# Altium PCB PCB.PcbDoc
Units mm, origin at the board's own origin, x right, y up, seen from the top; angles counter-clockwise.
Board outline 152.4 x 101.6 mm, 6 copper layers (L1(SIG), L2(GND), L3(SIG), L4(PWR), L5(GND), L6(SIG)), stack 0.97 mm thick; 152 components, 131 nets, 816 pads, 99 vias.
Unrouted connection lines stored in the file: 447.
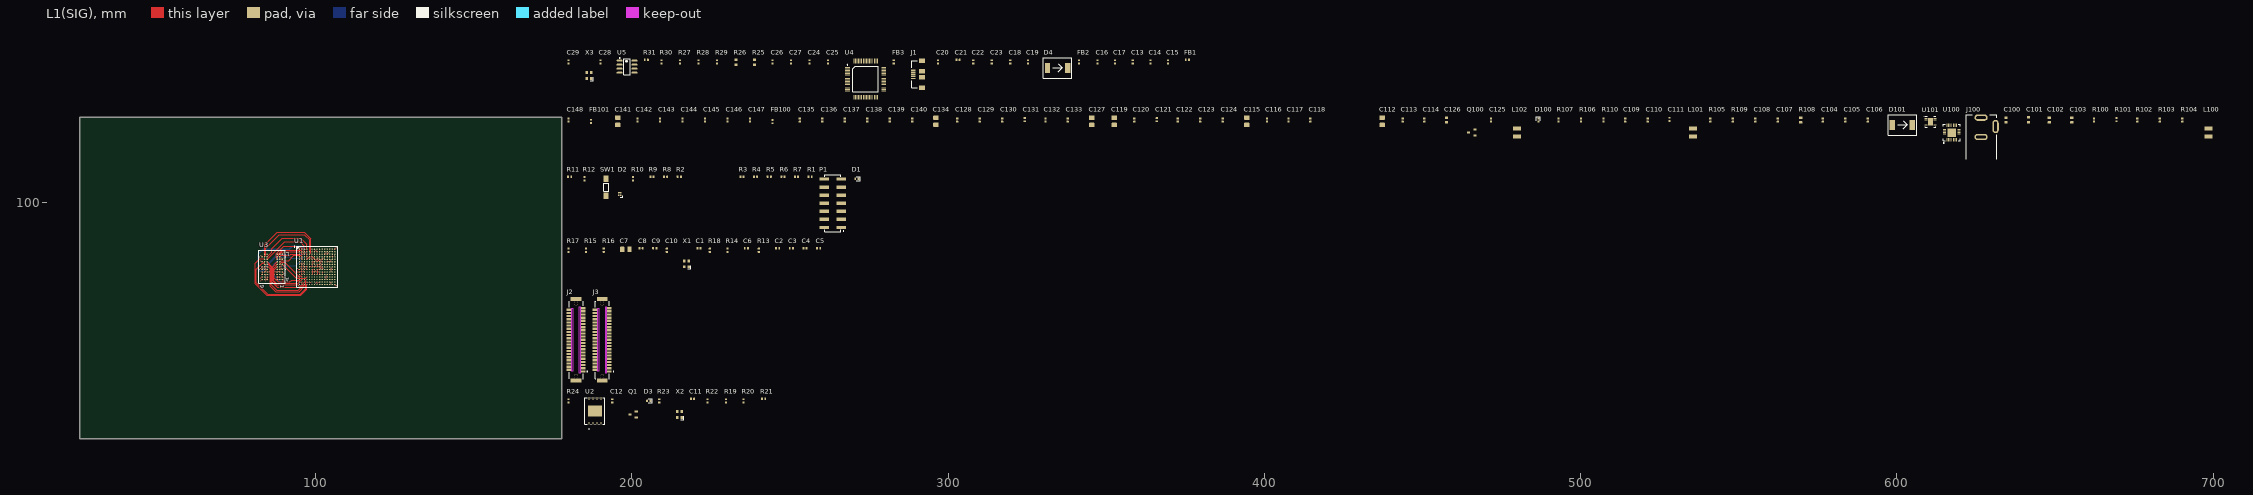
[diagram p0: L1(SIG) view]
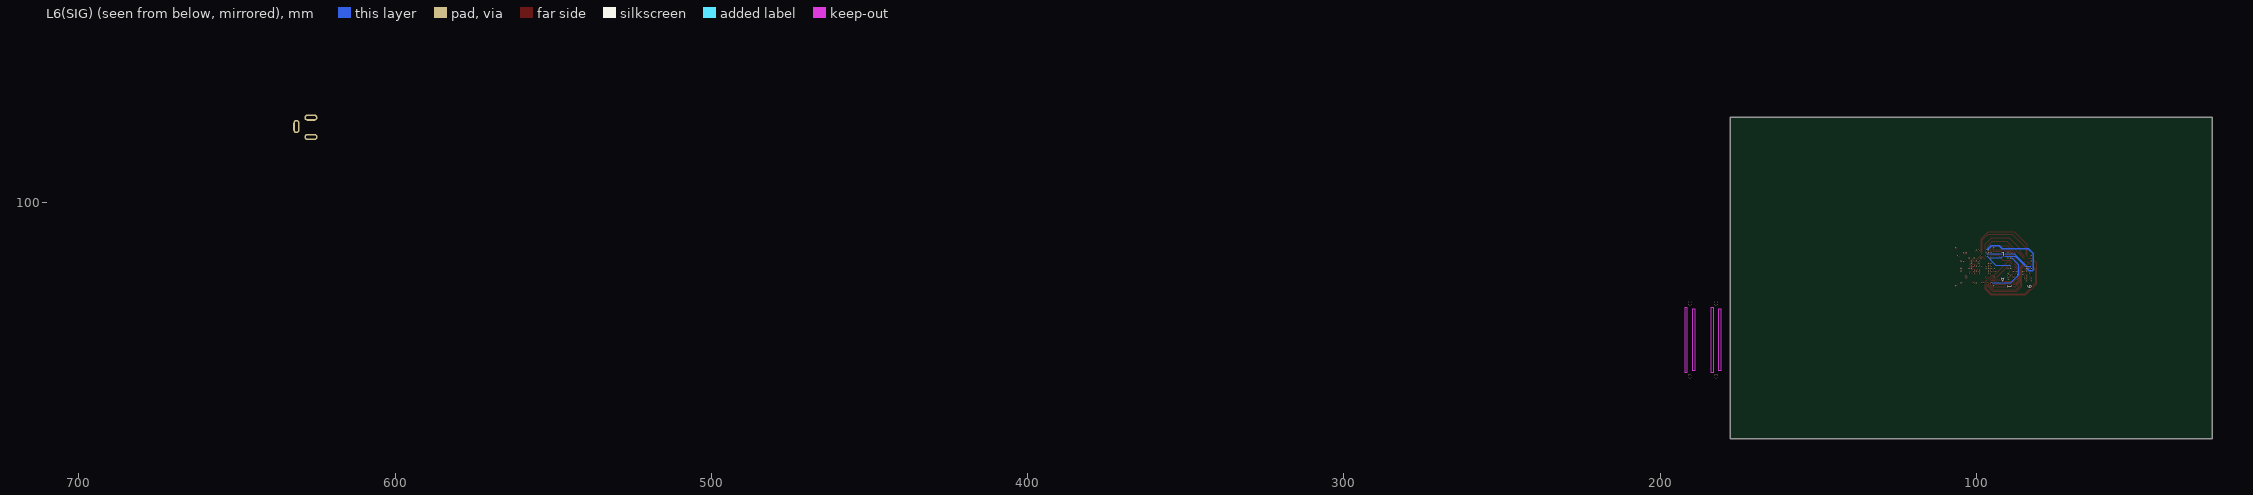
[diagram p1: L6(SIG) view, seen from below]
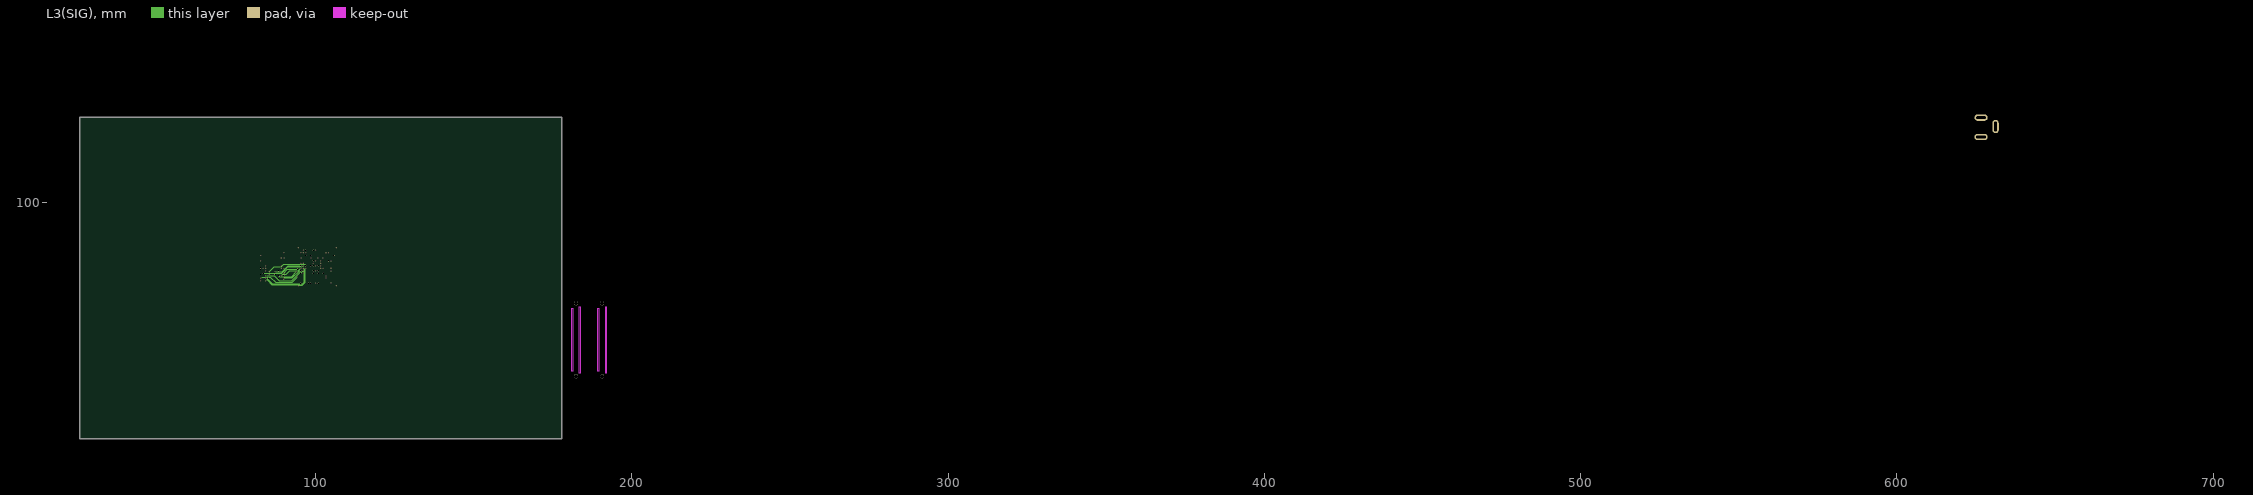
[diagram p2: L3(SIG)]

## Layer stack, top to bottom
Top Solder: solder mask 0.01, Solder Resist, Dk 3.5
L1(SIG): signal copper 0.035
Dielectric 4: prepreg 0.08, PP-010, Dk 4.2
L2(GND): signal copper 0.035
Dielectric 2: core 0.2, FR-4, Dk 4.2
L3(SIG): signal copper 0.035
Dielectric 1: prepreg 0.2, FR-4, Dk 4.8
L4(PWR): signal copper 0.035
Dielectric 3: core 0.2, FR-4, Dk 4.2
L5(GND): signal copper 0.035
Dielectric 5: prepreg 0.08, PP-010, Dk 4.2
L6(SIG): signal copper 0.035
Bottom Solder: solder mask 0.01, Solder Resist, Dk 3.5

## Board outline
25.4,25.4 177.8,25.4 177.8,127 25.4,127

## Design rules (kind name [scope] priority, off if disabled: settings)
Clearance [All] p1: gap=0.1 ignorepadtopadclearanceinfootprint=FALSE
DiffPairsRouting [All] p1: maxlimit=0.254 minlimit=0.1 mostfreqgap=0.127 toplayer_minwidth=0.1 toplayer_maxwidth=0.381 toplayer_prefwidth=0.127 midlayer1_minwidth=0.1 midlayer1_maxwidth=0.381 midlayer1_prefwidth=0.127 midlayer2_minwidth=0.1 midlayer2_maxwidth=0.381 midlayer2_prefwidth=0.127 midlayer3_minwidth=0.1 midlayer3_maxwidth=0.381 midlayer3_prefwidth=0.127 midlayer4_minwidth=0.1 midlayer4_maxwidth=0.381 midlayer4_prefwidth=0.127 bottomlayer_minwidth=0.1 bottomlayer_maxwidth=0.381 bottomlayer_prefwidth=0.127 maxuncoupledlength=12.7
MatchedLengths "Schematic Matched Net Lengths_1" [InNetClass('DDR2_ACC')] p1: tolerance=25.4 checknetsindiffpair=FALSE checkdiffpairvsdiffpair=TRUE checkxsignals=TRUE checkothers=TRUE usedelayunits=TRUE delaytolerance=150.000000
MatchedLengths "Schematic Matched Net Lengths" [InNetClass('DDR2_Bl0')] p2: tolerance=25.4 checknetsindiffpair=FALSE checkdiffpairvsdiffpair=TRUE checkxsignals=TRUE checkothers=TRUE usedelayunits=TRUE delaytolerance=150.000000
PolygonConnect [All] p1: connectstyle=Relief reliefconductorwidth=0.254 reliefentries=4 polygonreliefangle="90 Angle" airgapwidth=0.254
RoutingVias [All] p1: holewidth=0.711 width=1.27 viastyle="Through Hole" minholewidth=0.711 minwidth=1.27 maxholewidth=0.711 maxwidth=1.27
SolderMaskExpansion [All] p1: expansion=0.102 istentingtop=FALSE
SupplyNets "Schematic Supply Nets_9" [InNet('+VDC')] p1: voltage=0.000
SupplyNets "Schematic Supply Nets_8" [InNet('GND')] p2: voltage=0.000
SupplyNets "Schematic Supply Nets_7" [InNet('+5')] p3: voltage=0.000
SupplyNets "Schematic Supply Nets_6" [InNet('+5VUSB')] p4: voltage=0.000
SupplyNets "Schematic Supply Nets_5" [InNet('+1V8A')] p5: voltage=0.000
SupplyNets "Schematic Supply Nets_4" [InNet('+1V8')] p6: voltage=0.000
SupplyNets "Schematic Supply Nets_3" [InNet('+VCC')] p7: voltage=0.000
SupplyNets "Schematic Supply Nets_2" [InNet('+3V3')] p8: voltage=0.000
SupplyNets "Schematic Supply Nets_1" [InNet('+0V9_REF')] p9: voltage=0.000
SupplyNets "Schematic Supply Nets" [InNet('+1V')] p10: voltage=0.000
Width [All] p1: maxlimit=1 minlimit=0.1 preferedwidth=0.1
29 further rules are at their usual default settings.

## Classes and differential pairs
net class DDR2_Bl0: DDR2.DM0 DDR2.DQ0 DDR2.DQ1 DDR2.DQ2 DDR2.DQ3 DDR2.DQ4 DDR2.DQ5 DDR2.DQ6 DDR2.DQ7 DDR2.DQS0_N DDR2.DQS0_P
net class DDR2_ACC: DDR2.A0 DDR2.A1 DDR2.A2 DDR2.A3 DDR2.A4 DDR2.A5 DDR2.A6 DDR2.A7 DDR2.A8 DDR2.A9 DDR2.A10 DDR2.A11 DDR2.A12 DDR2.A13 DDR2.BA0 DDR2.BA1 DDR2.BA2 DDR2.CK_N DDR2.CK_P DDR2.CKE DDR2.NCAS DDR2.NCS DDR2.NRAS DDR2.NWE DDR2.ODT
component class USB: C13 C14 C15 C16 C17 C18 C19 C20 C21 C22 C23 C24 C25 C26 C27 C28 C29 D4 FB1 FB2 FB3 J1 R25 R26 R27 R28 R29 R30 R31 U4 U5 X3
component class Power: C100 C101 C102 C103 C104 C105 C106 C107 C108 C109 C110 C111 C112 C113 C114 C115 C116 C117 C118 C119 C120 C121 C122 C123 C124 C125 C126 C127 C128 C129 C130 C131 C132 C133 C134 C135 C136 C137 C138 C139 C140 C141 C142 C143 C144 C145 C146 C147 C148 D100 D101 FB100 FB101 J100 L100 L101 L102 Q100 R100 R101 R102 R103 R104 R105 R106 R107 R108 R109 R110 U1 U100 U101
component class Modes: D1 D2 P1 R1 R2 R3 R4 R5 R6 R7 R8 R9 R10 R11 R12 SW1
component class Memory: C1 C2 C3 C4 C5 C6 C7 C8 C9 C10 R13 R14 R15 R16 R17 R18 U3 X1
component class Connectors: J2 J3
component class Banks: C11 C12 D3 Q1 R19 R20 R21 R22 R23 R24 U2 X2
differential pair USB_D: +USB_D_P -USB_D_N
differential pair DDR2.DQS0: +DDR2.DQS0_P -DDR2.DQS0_N
differential pair DDR2.CK: +DDR2.CK_P -DDR2.CK_N
differential pair B15_L22: +B15_L22_P -B15_L22_N
differential pair B15_L18: +B15_L18_P -B15_L18_N
differential pair B15_L16: +B15_L16_P -B15_L16_N
differential pair B14_L20: +B14_L20_P -B14_L20_N
differential pair B14_L17: +B14_L17_P -B14_L17_N
differential pair B14_L13: +B14_L13_P -B14_L13_N
differential pair B14_L7: +B14_L7_P -B14_L7_N

## Components (designator, comment, footprint, x,y, rotation, side; value= is the part's Value field where it differs from the comment)
C1 "100n" CAP_0402 221.234,85.598 r0 top
C2 "4u7" CAP_0402 246.126,85.598 r0 top
C3 "100n" CAP_0402 250.444,85.598 r0 top
C4 "100n" CAP_0402 254.762,85.598 r0 top
C5 "100n" CAP_0402 259.08,85.598 r0 top
C6 "100n" CAP_0402 236.22,85.598 r0 top
C7 "4u7" CAP_0805 198.12,85.217 r0 top
C8 "100n" CAP_0402 202.946,85.598 r0 top
C9 "100n" CAP_0402 207.264,85.598 r0 top
C10 "100n" CAP_0402 211.074,84.963 r90 top
C11 "100n" CAP_0402 219.202,37.973 r0 top
C12 "100n" CAP_0402 193.802,37.338 r90 top
C13 "100n" CAP_0402 358.394,144.526 r90 top
C14 "100n" CAP_0402 363.982,144.526 r90 top
C15 "100n" CAP_0402 369.57,144.526 r90 top
C16 "100n" CAP_0402 347.218,144.526 r90 top
C17 "4u7" CAP_0402 352.806,144.526 r90 top
C18 "100n" CAP_0402 319.659,144.526 r90 top
C19 "4u7" CAP_0402 325.247,144.526 r90 top
C20 "100n" CAP_0402 296.799,144.526 r90 top
C21 "100n" CAP_0402 303.149,145.161 r0 top
C22 "100n" CAP_0402 307.975,144.526 r90 top
C23 "100n" CAP_0402 313.817,144.526 r90 top
C24 "4u7" CAP_0402 256.159,144.526 r90 top
C25 "4u7" CAP_0402 262.001,144.526 r90 top
C26 "100n" CAP_0402 244.475,144.526 r90 top
C27 "4u7" CAP_0402 250.317,144.526 r90 top
C28 "100n" CAP_0402 190.119,144.526 r90 top
C29 "22u" CAP_0402 179.959,144.526 r90 top
C100 "2u2" CAP_0603 634.492,126.111 r90 top
C101 "2u2" CAP_0603 641.604,126.238 r90 top
C102 "2u2" CAP_0603 648.208,126.111 r90 top
C103 "2u2" CAP_0603 655.32,126.111 r90 top
C104 "22u" CAP_0402 576.58,126.111 r90 top
C105 "22u" CAP_0402 583.692,126.111 r90 top
C106 "22u" CAP_0402 590.804,126.111 r90 top
C107 "22u" CAP_0402 562.356,126.111 r90 top
C108 "22u" CAP_0402 555.244,126.111 r90 top
C109 "100n" CAP_0402 514.096,126.111 r90 top
C110 "100n" CAP_0402 521.208,126.111 r90 top
C111 "22u" CAP_0402 528.066,126.365 r90 top
C112 "47u" CAP_0805 437.261,125.73 r90 top
C113 "4u7" CAP_0402 443.738,126.111 r90 top
C114 "470n" CAP_0402 450.596,126.111 r90 top
C115 "100u" CAP_0805 394.462,125.73 r90 top
C116 "4u7" CAP_0402 400.812,126.111 r90 top
C117 "470n" CAP_0402 407.67,126.111 r90 top
C118 "470n" CAP_0402 414.528,126.111 r90 top
C119 "47u" CAP_0805 352.552,125.73 r90 top
C120 "4u7" CAP_0402 358.902,126.111 r90 top
C121 "4u7" CAP_0402 366.014,126.238 r90 top
C122 "470n" CAP_0402 372.618,126.111 r90 top
C123 "470n" CAP_0402 379.73,126.111 r90 top
C124 "470n" CAP_0402 386.842,126.111 r90 top
C125 "22u" CAP_0402 471.678,126.111 r90 top
C126 "2u2" CAP_0603 457.581,126.111 r90 top
C127 "100u" CAP_0805 345.44,125.73 r90 top
C128 "4u7" CAP_0402 302.895,126.111 r90 top
C129 "4u7" CAP_0402 310.007,126.111 r90 top
C130 "470n" CAP_0402 317.119,126.111 r90 top
C131 "470n" CAP_0402 324.231,126.238 r90 top
C132 "470n" CAP_0402 330.835,126.111 r90 top
C133 "470n" CAP_0402 337.82,126.111 r90 top
C134 "100u" CAP_0805 296.164,125.73 r90 top
C135 "4u7" CAP_0402 253.111,126.111 r90 top
C136 "4u7" CAP_0402 260.223,126.111 r90 top
C137 "470n" CAP_0402 267.335,126.111 r90 top
C138 "470n" CAP_0402 274.447,126.111 r90 top
C139 "470n" CAP_0402 281.559,126.111 r90 top
C140 "470n" CAP_0402 288.671,126.111 r90 top
C141 "47u" CAP_0805 195.58,125.73 r90 top
C142 "4u7" CAP_0402 201.803,126.111 r90 top
C143 "4u7" CAP_0402 208.915,126.111 r90 top
C144 "100n" CAP_0402 216.027,126.111 r90 top
C145 "470n" CAP_0402 223.139,126.111 r90 top
C146 "470n" CAP_0402 230.251,126.111 r90 top
C147 "470n" CAP_0402 237.363,126.111 r90 top
C148 "100n" CAP_0402 179.959,126.111 r90 top
D1 "GREEN" LED_0402_GREEN 271.145,107.569 r0 top
D2 "SP3420-04UTG" uDFN-10 196.215,103.251 r90 top
D3 "GREEN" LED_0402_GREEN 205.359,37.338 r0 top
D4 "D_SCHOTTKY_SMC" SMC-DO-214AB 334.645,142.621 r0 top
D100 "GREEN" LED_0402_GREEN 486.664,126.111 r90 top
D101 "D_SCHOTTKY_SMC" SMC-DO-214AB 601.726,124.587 r0 top
FB1 "120R" FB_0402 375.666,145.161 r0 top
FB2 "120R" FB_0402 341.376,144.526 r90 top
FB3 "120R" FB_0402 282.829,144.526 r90 top
FB100 "FB0402" FB_0402 244.475,125.603 r90 top
FB101 "FB0402" FB_0402 187.071,125.73 r90 top
J1 "USB3100-30-A" USB3100-30-A 291.084,140.589 r90 top
J2 "DF9-41S-1V(32)" FP-DF9-41S-1V_32-MFG 182.372,56.642 r90 top
J3 "DF9-41S-1V(32)" FP-DF9-41S-1V_32-MFG 190.627,56.642 r90 top
J100 "CON-SOCJ-2155" CON-SOCJ-2155 626.618,120.777 r0 top
L100 "1u5" IND_1008 698.5,122.174 r90 top
L101 "1u5" IND_1008 535.559,122.174 r90 top
L102 "1u5" IND_1008 479.933,122.174 r90 top
P1 "61001421121" 61001421121 263.525,99.822 r90 top
Q1 "2N7002NXAKR" SSM3J338R,LF-SOT23-F 200.406,33.02 r90 top
Q100 "2N7002NXAKR" SSM3J338R,LF-SOT23-F 465.582,122.174 r90 top
R1 "1K" RES_0402 256.413,108.204 r0 top
R2 "22R" RES_0402 215.011,108.204 r0 top
R3 "4.7k" RES_0402 234.823,108.204 r0 top
R4 "4.7k" RES_0402 239.141,108.204 r0 top
R5 "1K" RES_0402 243.459,108.204 r0 top
R6 "4.7k" RES_0402 247.777,108.204 r0 top
R7 "1K" RES_0402 252.095,108.204 r0 top
R8 "22R" RES_0402 210.693,108.204 r0 top
R9 "22R" RES_0402 206.375,108.204 r0 top
R10 "22R" RES_0402 200.406,107.569 r90 top
R11 "1K" RES_0402 180.34,108.204 r0 top
R12 "1K" RES_0402 185.039,107.569 r90 top
R13 "R0402" RES_0402 240.157,84.963 r90 top
R14 "R0402" RES_0402 230.251,84.963 r90 top
R15 "4K7" RES_0402 185.547,84.963 r90 top
R16 "4K7" RES_0402 191.135,84.963 r90 top
R17 "100R" RES_0402 179.959,84.963 r90 top
R18 "10R" RES_0402 224.663,84.963 r90 top
R19 "1K" RES_0402 229.743,37.338 r90 top
R20 "12K" RES_0402 235.331,37.338 r90 top
R21 "12K" RES_0402 241.681,37.973 r0 top
R22 "10R" RES_0402 223.901,37.338 r90 top
R23 "330R" RES_0402 208.661,37.338 r90 top
R24 "22R" RES_0402 179.959,37.338 r90 top
R25 "100k" RES_0603 238.76,144.399 r90 top
R26 "100k" RES_0603 232.918,144.399 r90 top
R27 "12k" RES_0402 215.265,144.526 r90 top
R28 "12k" RES_0402 221.107,144.526 r90 top
R29 "12k" RES_0402 226.949,144.526 r90 top
R30 "12k" RES_0402 209.423,144.526 r90 top
R31 "2k49" RES_0402 204.597,145.161 r0 top
R100 "10k" RES_0402 662.305,126.111 r90 top
R101 "10k" RES_0402 669.417,126.238 r90 top
R102 "10k" RES_0402 676.021,126.111 r90 top
R103 "10k" RES_0402 683.133,126.111 r90 top
R104 "0R" RES_0402 690.245,126.111 r90 top
R105 "0R" RES_0402 541.02,126.111 r90 top
R106 "330R" RES_0402 500.126,126.111 r90 top
R107 "0R" RES_0402 493.014,126.111 r90 top
R108 "100K" RES_0603 569.595,126.111 r90 top
R109 "12k" RES_0402 548.132,126.111 r90 top
R110 "4k7" RES_0402 507.238,126.111 r90 top
SW1 "DTSM-3" DTSM-3 191.897,104.902 r90 top
U1 "XC7S25-2CSGA225I" CSGA225 100.5,79.7 r0 top
U2 "MT25QU256ABA1EW9-0SIT" W-PDFN-8MLP8_8X6_MRN 188.341,34.163 r90 top
U3 "MT47H128M8SH-25E:M" FBGA60_8X10_MRN 86.3,79.7 r180 top
U4 "FT2232HL-REEL" LQFP-64-0.5mm 273.939,139.065 r0 top
U5 "93LC56B-I/SN" SOIC-SN8_L 198.501,143.002 r0 top
U100 "MAX20029ATIF/V+" TQFN-28-5x5-EP 617.347,122.174 r90 top
U101 "LS1205EVD33" DFN3x3_10L 610.616,125.603 r0 top
X1 "ECS-2520MV-1000-BN-TR" XTAL_2520 217.297,80.645 r90 top
X2 "ECS-2520MV-120-BN-TR" XTAL_2520 215.138,33.02 r90 top
X3 "ECS-2520MV-130-BN-TR" XTAL_2520 186.436,140.208 r90 top

## Footprints (in the part's own frame and the unit in brackets; to place one, negate y for a bottom-side part, rotate by r counter-clockwise, add the part's x,y. Pads: shape width x height; smd on the part's side, far side on the other; paste and mask are expansions set on the pad)
61001421121 [mm] "Pin Header, pitch 2.54 mm, SMD, Vertical, dual row, 14p"
  rect 1x3.1 smd: 1(-7.62,-2.7) 2(-7.62,2.7) 3(-5.08,-2.7) 4(-5.08,2.7) 5(-2.54,-2.7) 6(-2.54,2.7) 7(0,-2.7) 8(0,2.7) 9(2.54,-2.7) 10(2.54,2.7) 11(5.08,-2.7) 12(5.08,2.7) 13(7.62,-2.7) 14(7.62,2.7)
  silkscreen extent -8.97,-3.53 8.97,2.57, body extent -8.89,-3.75 8.89,3.75, height 9.62
CAP_0402 [mm]
  rrect25% 0.6x0.7 smd: 1(-0.5,0) 2(0.5,0)
  body extent -0.5,-0.26 0.5,0.26, height 0.37
CAP_0603 [mm]
  rrect25% 0.8x1 smd: 1(-0.75,0) 2(0.75,0)
  body extent -0.8,-0.4 0.8,0.4, height 0.51
CAP_0805 [mm]
  rrect25% 1.4x1.7 smd: 1(-1.143,0) 2(1.143,0)
  body extent -1.15,-0.76 1.15,0.79, height 1.01
CON-SOCJ-2155 [mm]
  oval 4.2x2 hole 0.8 slot 3 at 0 deg: 1(0,6.1) 2(0,0)
  oval 2x4.2 hole 0.8 slot 3 at 90 deg: 3(4.6,3.3)
  silkscreen extent -4.75,-7 5,6.98, body extent -4.5,-7.5 4.75,6.6, height 11.11
CSGA225 [mm] "BGA, 225-Leads, Body 13.00x13.00mmx1.40mm, Pitch 0.80mm"
  round 0.4 smd: A1(-5.6,5.6) A2(-4.8,5.6) A3(-4,5.6) A4(-3.2,5.6) A6(-1.6,5.6) A7(-0.8,5.6) A8(0,5.6) A9(0.8,5.6) A10(1.6,5.6) A11(2.4,5.6) A12(3.2,5.6) A13(4,5.6) A14(4.8,5.6) A15(5.6,5.6) B1(-5.6,4.8) B2(-4.8,4.8) B3(-4,4.8) B4(-3.2,4.8) B5(-2.4,4.8) B6(-1.6,4.8) B7(-0.8,4.8) B8(0,4.8) B9(0.8,4.8) B10(1.6,4.8) B11(2.4,4.8) B12(3.2,4.8) B13(4,4.8) B14(4.8,4.8) B15(5.6,4.8) C1(-5.6,4) C2(-4.8,4) C3(-4,4) C4(-3.2,4) C5(-2.4,4) C6(-1.6,4) C7(-0.8,4) C8(0,4) C9(0.8,4) C10(1.6,4) C11(2.4,4) C12(3.2,4) C13(4,4) C14(4.8,4) C15(5.6,4) D1(-5.6,3.2) D2(-4.8,3.2) D3(-4,3.2) D4(-3.2,3.2) D5(-2.4,3.2) D6(-1.6,3.2) D7(-0.8,3.2) D8(0,3.2) D9(0.8,3.2) D10(1.6,3.2) D11(2.4,3.2) D12(3.2,3.2) D13(4,3.2) D14(4.8,3.2) D15(5.6,3.2) E1(-5.6,2.4) E2(-4.8,2.4) E3(-4,2.4) E4(-3.2,2.4) E5(-2.4,2.4) E6(-1.6,2.4) E7(-0.8,2.4) E8(0,2.4) E9(0.8,2.4) E10(1.6,2.4) E11(2.4,2.4) E12(3.2,2.4) E13(4,2.4) E14(4.8,2.4) E15(5.6,2.4) F1(-5.6,1.6) F2(-4.8,1.6) F3(-4,1.6) F4(-3.2,1.6) F5(-2.4,1.6) F6(-1.6,1.6) F7(-0.8,1.6) F8(0,1.6) F9(0.8,1.6) F10(1.6,1.6) F11(2.4,1.6) F12(3.2,1.6) F13(4,1.6) F14(4.8,1.6) F15(5.6,1.6) G1(-5.6,0.8) G2(-4.8,0.8) G3(-4,0.8) G4(-3.2,0.8) G5(-2.4,0.8) G6(-1.6,0.8) G7(-0.8,0.8) G8(0,0.8) G9(0.8,0.8) G10(1.6,0.8) G11(2.4,0.8) G12(3.2,0.8) G13(4,0.8) G14(4.8,0.8) G15(5.6,0.8) H1(-5.6,0) H2(-4.8,0) H3(-4,0) H4(-3.2,0) H5(-2.4,0) H6(-1.6,0) H7(-0.8,0) H8(0,0) H9(0.8,0) H10(1.6,0) H11(2.4,0) H12(3.2,0) H13(4,0) H14(4.8,0) H15(5.6,0) J1(-5.6,-0.8) J2(-4.8,-0.8) J3(-4,-0.8) J4(-3.2,-0.8) J5(-2.4,-0.8) J6(-1.6,-0.8) J7(-0.8,-0.8) J8(0,-0.8) J9(0.8,-0.8) J10(1.6,-0.8) J11(2.4,-0.8) J12(3.2,-0.8) J13(4,-0.8) J14(4.8,-0.8) J15(5.6,-0.8) K1(-5.6,-1.6) K2(-4.8,-1.6) K3(-4,-1.6) K4(-3.2,-1.6) K5(-2.4,-1.6) K6(-1.6,-1.6) K7(-0.8,-1.6) K8(0,-1.6) K9(0.8,-1.6) K10(1.6,-1.6) K11(2.4,-1.6) K12(3.2,-1.6) K13(4,-1.6) K14(4.8,-1.6) K15(5.6,-1.6) L1(-5.6,-2.4) L2(-4.8,-2.4) L3(-4,-2.4) L4(-3.2,-2.4) L5(-2.4,-2.4) L6(-1.6,-2.4) L7(-0.8,-2.4) L8(0,-2.4) L9(0.8,-2.4) L10(1.6,-2.4) L11(2.4,-2.4) L12(3.2,-2.4) L13(4,-2.4) L14(4.8,-2.4) L15(5.6,-2.4) M1(-5.6,-3.2) M2(-4.8,-3.2) M3(-4,-3.2) M4(-3.2,-3.2) M5(-2.4,-3.2) M6(-1.6,-3.2) M7(-0.8,-3.2) M8(0,-3.2) M9(0.8,-3.2) M10(1.6,-3.2) M11(2.4,-3.2) M12(3.2,-3.2) M13(4,-3.2) M14(4.8,-3.2) M15(5.6,-3.2) N1(-5.6,-4) N2(-4.8,-4) N3(-4,-4) N4(-3.2,-4) N5(-2.4,-4) N6(-1.6,-4) N7(-0.8,-4) N8(0,-4) N9(0.8,-4) N10(1.6,-4) N11(2.4,-4) N12(3.2,-4) N13(4,-4) N14(4.8,-4) N15(5.6,-4) P1(-5.6,-4.8) P2(-4.8,-4.8) P3(-4,-4.8) P4(-3.2,-4.8) P5(-2.4,-4.8) P6(-1.6,-4.8) P7(-0.8,-4.8) P8(0,-4.8) P9(0.8,-4.8) P10(1.6,-4.8) P11(2.4,-4.8) P12(3.2,-4.8) P13(4,-4.8) P14(4.8,-4.8) P15(5.6,-4.8) R1(-5.6,-5.6) R2(-4.8,-5.6) R3(-4,-5.6) R4(-3.2,-5.6) R5(-2.4,-5.6) R6(-1.6,-5.6) R7(-0.8,-5.6) R8(0,-5.6) R9(0.8,-5.6) R10(1.6,-5.6) R11(2.4,-5.6) R12(3.2,-5.6) R13(4,-5.6) R14(4.8,-5.6) R15(5.6,-5.6)
  silkscreen extent -7.27,-6.5 6.5,6.5, body extent -6.5,-6.5 6.5,6.5, height 1.4
DFN3x3_10L [mm]
  rect 0.9x0.25 smd mask+0.15: 1(-1.395,1) 2(-1.395,0.5) 3(-1.395,0) 4(-1.395,-0.5) 5(-1.395,-1) 6(1.395,-1) 7(1.395,-0.5) 8(1.395,0) 9(1.395,0.5) 10(1.395,1)
  rect 1.49x2.35 smd: 11(0,0)
  silkscreen extent -2.3,-1.7 1.7,1.8, body extent -1.55,-1.55 1.55,1.55, height 0.8
DTSM-3 [mm]
  rect 2x1.6 smd: 1(-2.7,0) 2(2.7,0)
  silkscreen extent -1.25,-0.75 1.25,0.75, body extent -3.6,-1.75 3.6,1.75, height 4.96
FB_0402 [mm]
  rrect25% 0.6x0.7 smd: 1(-0.5,0) 2(0.5,0)
  body extent -0.5,-0.25 0.5,0.25, height 0.51
FBGA60_8X10_MRN [mil]
  round 17 smd paste+0 mask+0: A1(-125.98,157.48) A2(-94.49,157.48) A3(-62.99,157.48) A7(62.99,157.48) A8(94.49,157.48) A9(125.98,157.48) B1(-125.98,125.98) B2(-94.49,125.98) B3(-62.99,125.98) B7(62.99,125.98) B8(94.49,125.98) B9(125.98,125.98) C1(-125.98,94.49) C2(-94.49,94.49) C3(-62.99,94.49) C7(62.99,94.49) C8(94.49,94.49) C9(125.98,94.49) D1(-125.98,62.99) D2(-94.49,62.99) D3(-62.99,62.99) D7(62.99,62.99) D8(94.49,62.99) D9(125.98,62.99) E1(-125.98,31.5) E2(-94.49,31.5) E3(-62.99,31.5) E7(62.99,31.5) E8(94.49,31.5) E9(125.98,31.5) F2(-94.49,0) F3(-62.99,0) F7(62.99,0) F8(94.49,0) F9(125.98,0) G1(-125.98,-31.5) G2(-94.49,-31.5) G3(-62.99,-31.5) G7(62.99,-31.5) G8(94.49,-31.5) H2(-94.49,-62.99) H3(-62.99,-62.99) H7(62.99,-62.99) H8(94.49,-62.99) H9(125.98,-62.99) J1(-125.98,-94.49) J2(-94.49,-94.49) J3(-62.99,-94.49) J7(62.99,-94.49) J8(94.49,-94.49) K2(-94.49,-125.98) K3(-62.99,-125.98) K7(62.99,-125.98) K8(94.49,-125.98) K9(125.98,-125.98) L1(-125.98,-157.48) L2(-94.49,-157.48) L3(-62.99,-157.48) L7(62.99,-157.48) L8(94.49,-157.48)
  silkscreen extent -170,-209 170,209, body extent -159,-199 159,199, height 47
FP-DF9-41S-1V_32-MFG [mm]
  rect 0.7x1.5 smd paste+0 mask+0: 1(-10,-2.25) 2(-9.5,2.25) 3(-9,-2.25) 4(-8.5,2.25) 5(-8,-2.25) 6(-7.5,2.25) 7(-7,-2.25) 8(-6.5,2.25) 9(-6,-2.25) 10(-5.5,2.25) 11(-5,-2.25) 12(-4.5,2.25) 13(-4,-2.25) 14(-3.5,2.25) 15(-3,-2.25) 16(-2.5,2.25) 17(-2,-2.25) 18(-1.5,2.25) 19(-1,-2.25) 20(-0.5,2.25) 21(0,-2.25) 22(0.5,2.25) 23(1,-2.25) 24(1.5,2.25) 25(2,-2.25) 26(2.5,2.25) 27(3,-2.25) 28(3.5,2.25) 29(4,-2.25) 30(4.5,2.25) 31(5,-2.25) 32(5.5,2.25) 33(6,-2.25) 34(6.5,2.25) 35(7,-2.25) 36(7.5,2.25) 37(8,-2.25) 38(8.5,2.25) 39(9,-2.25) 40(9.5,2.25) 41(10,-2.25)
  rect 1.3x3.4 smd paste+0 mask+0: 42(-12.85,0) 43(12.85,0)
  round 1.3 hole 1.3 unplated paste-2539.97 mask+0: ""(-11.55,0) ""(11.55,0)
  Keep-Out Layer region: -10.35,-1.5 10.35,-1.5 10.35,-0.92 -10.35,-0.92
  Keep-Out Layer region: -9.85,0.92 9.85,0.92 9.85,1.5 -9.85,1.5
  silkscreen extent -12.25,-3.7 12.25,2.2, body extent -13.6,-3.1 13.6,3.1, height 0.25
IND_1008 [mm]
  rrect25% 1.3x2.54 smd: 1(-1.25,0) 2(1.25,0)
  body extent -1.3,-1.05 1.3,1.05, height 1.71
LED_0402_GREEN [mm]
  rrect25% 0.6x0.7 smd: A(-0.5,0) K(0.5,0)
  silkscreen extent -0.15,-0.65 1.1,0.65, body extent -0.51,-0.25 0.51,0.25, height 0.45
LQFP-64-0.5mm [mm] "TSQFP, 64-Leads, Body 10.00x10.00mm, Pitch 0.50mm, IPC Medium Density"
  rrect25% 1.5x0.3 smd mask+0.05: 1(-5.75,3.75) 2(-5.75,3.25) 3(-5.75,2.75) 4(-5.75,2.25) 5(-5.75,1.75) 6(-5.75,1.25) 7(-5.75,0.75) 8(-5.75,0.25) 9(-5.75,-0.25) 10(-5.75,-0.75) 11(-5.75,-1.25) 12(-5.75,-1.75) 13(-5.75,-2.25) 14(-5.75,-2.75) 15(-5.75,-3.25) 16(-5.75,-3.75) 33(5.75,-3.75) 34(5.75,-3.25) 35(5.75,-2.75) 36(5.75,-2.25) 37(5.75,-1.75) 38(5.75,-1.25) 39(5.75,-0.75) 40(5.75,-0.25) 41(5.75,0.25) 42(5.75,0.75) 43(5.75,1.25) 44(5.75,1.75) 45(5.75,2.25) 46(5.75,2.75) 47(5.75,3.25) 48(5.75,3.75)
  rrect25% 0.3x1.5 smd mask+0.05: 17(-3.75,-5.75) 18(-3.25,-5.75) 19(-2.75,-5.75) 20(-2.25,-5.75) 21(-1.75,-5.75) 22(-1.25,-5.75) 23(-0.75,-5.75) 24(-0.25,-5.75) 25(0.25,-5.75) 26(0.75,-5.75) 27(1.25,-5.75) 28(1.75,-5.75) 29(2.25,-5.75) 30(2.75,-5.75) 31(3.25,-5.75) 32(3.75,-5.75) 49(3.75,5.75) 50(3.25,5.75) 51(2.75,5.75) 52(2.25,5.75) 53(1.75,5.75) 54(1.25,5.75) 55(0.75,5.75) 56(0.25,5.75) 57(-0.25,5.75) 58(-0.75,5.75) 59(-1.25,5.75) 60(-1.75,5.75) 61(-2.25,5.75) 62(-2.75,5.75) 63(-3.25,5.75) 64(-3.75,5.75)
  silkscreen extent -5.87,-4 4,4.62, body extent -6,-6 6,6, height 1.6
RES_0402 [mm]
  rrect25% 0.6x0.7 smd: 1(-0.5,0) 2(0.5,0)
  body extent -0.5,-0.25 0.5,0.25, height 0.3
RES_0603 [mm]
  rrect25% 0.8x1 smd: 1(-0.75,0) 2(0.75,0)
  body extent -0.8,-0.43 0.8,0.43, height 0.52
SMC-DO-214AB [mm]
  rect 1.72x3.2 smd: A(-3.2,0) K(3.2,0)
  silkscreen extent -4.5,-3.25 4.5,3.25, body extent -3.98,-2.95 3.98,2.95, height 2.32
SOIC-SN8_L [mm] "SOIC, 8-Leads, Body 4.9x3.9mm, Pitch 1.27mm, IPC High Density"
  oval 1.9x0.6 smd: 1(-2.35,1.905) 2(-2.35,0.635) 3(-2.35,-0.635) 4(-2.35,-1.905) 5(2.35,-1.905) 6(2.35,-0.635) 7(2.35,0.635) 8(2.35,1.905)
  silkscreen extent -2.47,-2.5 1,2.88, body extent -2,-2.5 2,2.5, height 1.75
SSM3J338R,LF-SOT23-F [mm]
  rrect25% 0.6x1 smd: D(0,1) G(-0.95,-1) S(0.95,-1)
  body extent -1.45,-1.2 1.45,1.2, height 0.91
TQFN-28-5x5-EP [mm] "QFN, 28-Leads, Body 5.00x5.00mm, Pitch 0.50mm, Thermal Pad 2.70x2.70mm, IPC Medium Density"
  rect 1.05x0.25 smd mask+0.15: 1(-2.3,1.5) 2(-2.3,1) 3(-2.3,0.5) 4(-2.3,0) 5(-2.3,-0.5) 6(-2.3,-1) 7(-2.3,-1.5) 15(2.3,-1.5) 16(2.3,-1) 17(2.3,-0.5) 18(2.3,0) 19(2.3,0.5) 20(2.3,1) 21(2.3,1.5)
  rect 0.25x1.05 smd mask+0.15: 8(-1.5,-2.3) 9(-1,-2.3) 10(-0.5,-2.3) 11(0,-2.3) 12(0.5,-2.3) 13(1,-2.3) 14(1.5,-2.3) 22(1.5,2.3) 23(1,2.3) 24(0.5,2.3) 25(0,2.3) 26(-0.5,2.3) 27(-1,2.3) 28(-1.5,2.3)
  rect 2.7x2.7 smd paste+0 mask+0.05: 29(0,0)
  silkscreen extent -3.42,-2.65 2.65,2.65, body extent -2.55,-2.55 2.55,2.55, height 0.8
uDFN-10 [mm]
  rrect10% 0.2x0.5 smd mask+0: 29(-0.5,-0.35) 29(-0.5,0.35) 47(0.5,-0.35) 47(0.5,0.35) 56(1,-0.35) 56(1,0.35) 110(-1,-0.35) 110(-1,0.35)
  rrect10% 0.4x1.2 smd mask+0: 38(0,0)
  silkscreen extent -1.51,-0.87 -1,-0.2, body extent -1.25,-0.51 1.25,0.51, height 0.47
USB3100-30-A [mm]
  rect 0.4x1.35 smd mask+0.15: 1(1.3,2.063) 2(0.65,2.063) 3(0,2.063) 4(-0.65,2.063) 5(-1.3,2.063)
  rect 1.4x1.9 smd: SH(-4.3,-0.613) SH(4.3,-0.613)
  rect 1.4x1.9 smd mask+0.3: SH(-0.95,-0.613) SH(0.95,-0.613)
  silkscreen extent -4.25,0.75 4.25,2.5, body extent -4.61,-3.34 4.61,2.16, height 2.69
W-PDFN-8MLP8_8X6_MRN [mil]
  rect 34x16 smd paste+0 mask+0: 1(-154.5,75) 2(-154.5,25) 3(-154.5,-25) 4(-154.5,-75) 5(154.5,-75) 6(154.5,-25) 7(154.5,25) 8(154.5,75)
  rect 138x173 smd paste+0 mask+0: 9(0,0)
  silkscreen extent -227,-125 164,125, body extent -159,-120 159,120, height 32
XTAL_2520 [mm]
  rrect10% 0.9x0.8 smd mask+0: 1(-0.925,-0.725) 2(0.925,-0.725) 3(0.925,0.725) 4(-0.925,0.725)
  silkscreen extent -1.6,-1.33 -0.54,-0.36, body extent -1.25,-1 1.25,1, height 0.8

## Part data
C1 C2 C3 C4 C5 C6 C8 C9 C10 C11 C12 C13 C14 C15 C16 C17 C18 C19 C20 C21 C22 C23 C24 C25 C26 C27 C28 C29 C104 C105 C106 C107 C108 C109 C110 C111 C113 C114 C116 C117 C118 C120 C121 C122 C123 C124 C125 C128 C129 C130 C131 C132 C133 C135 C136 C137 C138 C139 C140 C142 C143 C144 C145 C146 C147 C148: library part CAP_0402, "Capacitor SMD 0402"
C7 C112 C115 C119 C127 C134 C141: library part CAP_0805, "Capacitor SMD 0805"
C100 C101 C102 C103 C126: library part CAP_0603, "Capacitor SMD 0603"
D1 D3 D100: library part LED_0402_GREEN, "LED 0402 GREEN SMD"
D2: "TVS Diode Array Low Capacitance ESD Protection 4-Channel (Vwork=3V3, Vclamp=6V)", Manufacturer=Littelfuse, Manufacturer Part Number=SP3420-04UTG
D4 D101: "Diode Schottky SMD SMC (DO-214AB)"
FB1 FB2 FB3 FB100 FB101: library part FB_0402, "Ferrite Bead SMD 0402"
J1: "USB Connector Type Micro B 2.0 SMD Reverse Mount", Manufacturer=GCT, Manufacturer Part Number=USB3100-30-A
J2 J3: library part CMP-11605-000057-1, "CONN RCPT 41POS SMD TIN", Current Rating=500mA, Flammability Rating="UL94 V-0", Housing Color=Beige, Package Quantity=1, Voltage Rating=150V, Connector Type=Receptacle, Contact Material=Copper, Contact Plating=Tin, Gender=Receptacle, Housing Material=Polyamide, Lead Free="Lead Free", Mated Stacking Heights=4.3mm, Mount="Surface Mount", Number of Contacts=41, Number of Positions=41, Number of Rows=2, Orientation=Straight, Packaging="Tape and Reel", Pitch=1mm, Radiation Hardening=No, REACH SVHC="No SVHC", Termination=SMD/SMT
J100: "DC Barrell Jack 2.1mm 30V 2.5A THT", Manufacturer=Gravitech, Manufacturer Part Number=CON-SOCJ-2155
L100 L101 L102: library part IND_1008, "Inductor SMD 1008"
P1: library part CMP-1502-01031-3, Color=Black, Contact Resistance=20mΩ, Current Rating=3A, Operating Supply Voltage=250V, Connector Type="Male Pin", Contact Material=Copper, Contact Mating Length=5.9944mm, Contact Plating=Gold, Gender=Male, Lead Pitch=2.54mm, Mount="Surface Mount", NexarPartId=32855434, Number of Contacts=14, Number of Pins=14, Number of Positions=14, Number of Rows=2, Orientation=Vertical, Pitch=2.54mm, REACH SVHC=Unknown, RoHS=Compliant, Row Spacing=2.54mm, Termination=Solder
Q1 Q100: "MOSFET N-Channel Vds=60V Id=300mA with ESD Protection", Manufacturer=Nexperia, Manufacturer Part Number=2N7002NXAKR
R1 R2 R3 R4 R5 R6 R7 R8 R9 R10 R11 R12 R13 R14 R15 R16 R17 R18 R19 R20 R21 R22 R23 R24 R27 R28 R29 R30 R31 R100 R101 R102 R103 R104 R105 R106 R107 R109 R110: library part RES_0402, "Resistor SMD 0402"
R25 R26 R108: library part RES_0603, "Resistor SMD 0603"
SW1: "Tactile Switch SMD SPST", Manufacturer=Diptronics, Manufacturer Part Number=DTSM-3
U1: "Field-Programmable Gate Array FPGA Spartan-7 Series CSGA-225 Speed Grade 2 Industrial Temperature Range", LCSC=C1521711, Manufacturer=Xilinx, Distributor Link=https://www.lcsc.com/product-detail/Programmable-Logic-Device-CPLDs-FPGAs_XILINX-XC7S25-2CSGA225I_C1521711.html, Manufacturer Part Number=XC7S25-2CSGA225I
U2 U3: "No Description Available", Mfr_Name=Micron, RefDes=RefDes, Type=Type
U4: "Hi-Speed Dual USB UART/FIFO IC", LCSC=C27882, Manufacturer=FTDI, Distributor Link=https://www.mouser.de/ProductDetail/FTDI/FT2232HL-REEL?qs=D1%2FPMqvA100v7FHcEx164g%3D%3D, Manufacturer Part Number=FT2232HL-REEL
U5: library part CMP-0162-00077-1, "2K, 128x16-bit, 2.5V Microwire Serial EEPROM, 8-Pin SOIC 150mil, Industrial Temperature", Code_IPC=SOIC127P600-8, Code_JEDEC=MS-012, DatasheetVersion="revF, May-2008", PackageDescription="8-Lead Plastic Small Outline (SN) - Narrow, 3.90mm Body [SOIC]", PackageReference=SOIC-SN8, PackageVersion="revBB, Aug-2009"
U100: "Switching Voltage Regulator Buck 4-Channel 700mV to 4V 1.5A TQFN-EP-28", Manufacturer="Maxim Integrated", Manufacturer Part Number=MAX20029ATIF/V+
U101: "18V, 5A eFuse with Programmable Current Limit and Output Voltage Clamp", Manufacturer=Littelfuse, Manufacturer Part Number=LS1205EVD33
X1 X2: library part ECS-2520MV-130-BN-TR, "Standard Clock Oscillators XO (Standard),13MHz,Standby (Power Down),CMOS, Multi-Volt,1.6 V 3.6 V,+/-50ppm,-40 C 85 C,6mA,Surface Mount,4-SMD, No Lead,(2.50mm x 2.00mm),(0.80mm)", Manufacturer=ECS, Manufacturer Part Number=ECS-2520MV-130-BN-TR
X3: "Standard Clock Oscillators XO (Standard),13MHz,Standby (Power Down),CMOS, Multi-Volt,1.6 V 3.6 V,+/-50ppm,-40 C 85 C,6mA,Surface Mount,4-SMD, No Lead,(2.50mm x 2.00mm),(0.80mm)", Manufacturer=ECS, Manufacturer Part Number=ECS-2520MV-130-BN-TR

## Via types
v1: diameter 0.45, hole 0.15, L1(SIG) to L6(SIG), 99 vias

## Nets (pads, with @x,y where several pads share a name; then routed paths per layer and width w, separated by ;. In a path a pad name is that pad's centre, name@x,y a point inside that pad or via, vN(x,y) a via of type N, cw(c..) or ccw(c..) an arc to the next point about the centre after c; other vN are vias at no path point)
+0V9_REF: C6.2 R13.1 R14.2 U3.E2 | length 0.6
  L1(SIG) w0.3: U3.E2 v1(89.1,79.3)
+1V: C104.2 C105.2 C106.2 C112.2 C113.2 C114.2 C119.2 C120.2 C121.2 C122.2 C123.2 C124.2 L100.2 U1.E8 U1.E10 U1.F7 U1.G10 U1.H7 U1.J10 U1.K7 U1.K9 U100.28 | length 4
  L1(SIG) w0.3: v1(99.3,81.7) U1.F7 ; U1.K7 v1(100.1,78.5) ; U1.H7 v1(100.1,80.1) ; U1.E8 v1(100.9,82.5) ; v1(101.7,80.1) U1.G10 ; U1.J10 v1(102.5,79.3) ; U1.E10 v1(102.5,82.5)
+1V8: C2.2 C3.2 C4.2 C5.2 C7.2 C8.2 C9.2 C10.2 C13.2 C14.2 C15.2 C27.2 C111.2 C115.2 C116.2 C117.2 C118.2 C141.2 C142.2 C143.2 C144.2 C145.2 C146.2 C147.2 FB101.1 L101.2 R13.2 U1.C3 U1.G2 U1.L3 U3.A1 U3.A9 U3.C1 U3.C3 U3.C7 U3.C9 U3.E1 U3.E9 U3.H9 U3.L1 U4.12 U4.37 U4.49 U4.64 U100.8 | length 7.2
  L1(SIG) w0.3: v1(82.6,77.3) U3.C9 ; v1(82.6,78.9) U3.E9 ; v1(82.7,75.3) U3.A9 ; v1(82.7,81.7) U3.H9 ; U3.C7 v1(85.3,77.3) ; v1(87.316,77.3) U3.C3 ; U3.A1 v1(90,75.7) ; U3.C1 89.536,77.3 89.818,77.018 89.871,77.018 v1(89.9,76.989) ; U3.E1 v1(89.9,79.3) ; U3.L1 v1(89.9,84.1) ; v1(95.3,80.9) U1.G2 ; v1(96.1,77.7) U1.L3 ; v1(96.1,84.1) U1.C3
+1V8A: C148.2 FB101.2 U1.F9 | length 0.6
  L1(SIG) w0.3: U1.F9 v1(101.7,80.9)
+3V3: C1.2 C11.2 C12.2 C20.2 C21.2 C22.2 C23.2 C26.2 C28.2 C29.2 C125.2 C127.1 C128.2 C129.2 C130.2 C131.2 C132.2 C133.2 C134.2 C135.2 C136.2 C137.2 C138.2 C139.2 C140.2 D1.K FB1.1 FB2.1 J2.1 J2.3 J2.5 J3.1 J3.3 J3.5 L102.2 P1.2 R3.2 R4.2 R5.2 R6.2 R7.2 R19.2 R20.2 R21.2 R23.2 R27.2 R28.2 R29.2 R106.2 U1.B7 U1.C11 U1.E6 U1.F12 U1.H5 U1.J14 U1.M12 U1.P5 U1.P9 U2.8 U4.20 U4.31 U4.42 U4.50 U4.56 U5.8 U100.22 X1.1 X1.4 X2.1 X2.4 X3.1 X3.4 | length 5.1
  L1(SIG) w0.3: U1.P5 v1(98.5,74.5) ; U1.H5 v1(98.5,80.1) ; v1(98.5,82.5) U1.E6 ; v1(99.3,84.9) U1.B7 ; v1(100.9,74.5) U1.P9 ; U1.C11 v1(103.3,84.1) ; v1(103.3,76.9) U1.M12 ; U1.F12 v1(104.1,81.7) ; v1(104.9,79.3) U1.J14
+5: C100.2 C101.2 C102.2 C103.2 C108.2 C126.2 R100.2 R101.2 R102.2 R103.2 R104.2 U100.2 U100.7 U100.15 U100.20 U100.26 U101.8 U101.9 U101.10
+5VUSB: C24.2 FB3.1 J1.1
+VCC: C107.2 D4.K D101.K R108.2 R109.1 U101.1 U101.2 U101.3
+VDC: D101.A J100.1
B14_L7_N: J2.11 U1.L14
B14_L7_P: J2.9 U1.L13
B14_L13_N: J2.19 U1.M10
B14_L13_P: J2.17 U1.M9
B14_L17_N: J2.27 U1.R10
B14_L17_P: J2.25 U1.R9
B14_L20_N: J2.33 U1.N7
B14_L20_P: J2.31 U1.N6
B15_L16_N: U1.D13
B15_L16_P: U1.D12
B15_L18_N: U1.E13
B15_L18_P: U1.E12
B15_L22_N: U1.G14
B15_L22_P: U1.G13
B34_L16_N: J3.11
B34_L16_P: J3.9
B34_L18_N: J3.21
B34_L18_P: J3.19
B34_L22_N: J3.31
B34_L22_P: J3.29
CLK_12MHZ_FPGA: R22.2 U1.R13
CLK_12MHZ_FPGA_R: R22.1 X2.3
CLK_100MHZ_FPGA: R18.2 U1.H1
CLK_100MHZ_FPGA_R: R18.1 X1.3
DDR2.A0: U1.N3 U3.H8 | length 28.6
  L1(SIG) w0.1: U3.H8 83.4,80.8 83.117,80.8 81.3,78.983 81.3,74.7 84.9,71.1 95.1,71.1 96.85,72.85 96.85,75.35 U1.N3
DDR2.A1: U1.P1 U3.H3 | length 16
  L1(SIG) w0.1: U3.H3 86.4,79.8 86.4,75.3 87.619,74.081 94.081,74.081 94.5,74.5 U1.P1
DDR2.A2: U1.R2 U3.H7 | length 17.4
  L1(SIG) w0.1: U3.H7 86.2,79.8 86.2,75.034 87.909,73.325 94.925,73.325 U1.R2
DDR2.A3: U1.P2 U3.J2 | length 17.4
  L1(SIG) w0.1: U3.J2 v1(89.1,82.5) ; v1(95.3,74.5) U1.P2
  L6(SIG) w0.1: v1(89.1,82.5) 89.033,82.433 88.733,82.433 86.6,80.3 86.6,77.27 89.37,74.5 v1(95.3,74.5)
DDR2.A4: U1.R4 U3.J8 | length 30.4
  L1(SIG) w0.1: U3.J8 83.876,82.1 83.676,82.3 82.3,82.3 80.9,80.9 80.9,74.3 84.5,70.7 95.3,70.7 97.3,72.7 U1.R4
DDR2.A5: U1.A2 U3.J3 | length 11.6
  L1(SIG) w0.127: U3.J3 87.848,82.152 87.848,82.415 87.521,82.743 87.521,83.857 89.963,86.3 94.918,86.3 95.66,85.558 95.66,85.34 U1.A2
DDR2.A6: U1.A3 U3.J7 | length 15.6
  L1(SIG) w0.127: U3.J7 90.2,87.6 95.1,87.6 96.5,86.2 U1.A3
DDR2.A7: U1.C1 U3.K2 | length 6.5
  L1(SIG) w0.127: U3.K2 89.1,83.3 91.804,83.3 92.204,83.7 U1.C1
DDR2.A8: U1.B5 U3.K8 | length 22.8
  L1(SIG) w0.127: U3.K8 83.9,83.246 83.974,83.321 84.057,83.321 84.279,83.543 84.279,85.579 88.5,89.8 96.5,89.8 98.1,88.2 U1.B5
DDR2.A9: U1.B2 U3.K3 | length 9.2
  L1(SIG) w0.127: U3.K3 88.321,83.321 88.321,83.857 89.4,84.937 95.319,84.937 95.7,84.555 U1.B2
DDR2.A10: U1.D2 U3.H2 | length 8
  L1(SIG) w0.127: U3.H2 89.1,81.7 91.5,81.7 93.1,83.3 95.3,83.3 U1.D2
DDR2.A11: U1.A4 U3.K7 | length 17.9
  L1(SIG) w0.127: U3.K7 86.15,84.35 86.15,85.45 89.4,88.7 95.4,88.7 97.3,86.8 U1.A4
DDR2.A12: U1.B1 U3.L2 | length 6.5
  L1(SIG) w0.1: U3.L2 89.5,84.5 U1.B1
DDR2.A13: U1.C5 U3.L8 | length 25.2
  L1(SIG) w0.127: U3.L8 83.9,86.7 87.9,90.7 96.4,90.7 98.5,88.6 98.5,84.1 U1.C5
DDR2.BA0: U1.M2 U3.G2 | length 9.2
  L1(SIG) w0.1: U3.G2 89.3,81.1 90.3,81.1 94.5,76.9 95.3,76.9 U1.M2
DDR2.BA1: U1.N2 U3.G3 | length 15.4
  L1(SIG) w0.1: U3.G3 86.741,79.341 86.741,75.359 87.6,74.5 93.7,74.5 94.45,75.25 95.25,75.25 U1.N2
DDR2.BA2: U1.M4 U3.G1 | length 9.8
  L1(SIG) w0.1: U3.G1 93.9,76.1 96.9,76.1 U1.M4
DDR2.CK_N: R17.1 U1.B3 U3.F8 | length 24.7
  L1(SIG) w0.1: v1(83.5,79.3) U3.F8 ; v1(96.1,84.9) U1.B3
  L6(SIG) w0.1: v1(83.5,79.3) 83.595,79.3 83.706,79.189 83.719,79.189 83.778,79.13 83.778,79.047 83.255,78.525 82.445,78.525 82.1,78.87 82.1,83.8 83.573,85.273 91.799,85.273 92.726,86.2 95.33,86.2 96.387,85.144 96.387,85.061 96.328,85.002 96.297,85.002 96.195,84.9 v1(96.1,84.9)
DDR2.CK_P: R17.2 U1.B4 U3.E8 | length 26.2
  L1(SIG) w0.1: U3.E8@83.882,78.9 U3.E8 ; U3.E8@83.9,78.918 v1@84.282,79.3 ; v1(96.9,84.9) U1.B4
  L6(SIG) w0.1: v1(84.282,79.318) 84.192,79.318 84.005,79.13 84.005,78.953 83.349,78.298 82.351,78.298 81.873,78.776 81.873,83.894 83.479,85.5 91.705,85.5 92.632,86.427 95.424,86.427 96.613,85.238 96.613,85.061 96.672,85.002 96.703,85.002 96.805,84.9 v1(96.9,84.9)
DDR2.CKE: R15.2 U1.D4 U3.F2 | length 10.3
  L1(SIG) w0.1: U3.F2 v1(89.1,80.1) ; v1(96.9,83.3) U1.D4
  L6(SIG) w0.1: v1(89.1,80.1) 93.7,80.1 v1(96.9,83.3)
DDR2.DM0: U1.K1 U3.B3 | length 8
  L1(SIG) w0.1: U3.B3@87.9,76.491 v1(88.3,76.891) ; v1(93.9,78.1) U1.K1
  L3(SIG) w0.1: v1(88.3,76.891) 88.666,76.525 89.647,76.525 89.737,76.614 92.414,76.614 v1(93.9,78.1)
DDR2.DQ0: U1.K3 U3.C8 | length 14.9
  L1(SIG) w0.1: U3.C8 v1(84.3,76.9) ; v1(96.1,78.5) U1.K3
  L3(SIG) w0.1: v1(84.3,76.9) 86.97,76.9 88.545,75.325 92.408,75.325 95.151,78.068 95.668,78.068 v1(96.1,78.5)
DDR2.DQ1: U1.J2 U3.C2 | length 8.3
  L1(SIG) w0.1: U3.C2 U3.C2@88.718,77.3 ; U3.C2@88.709,77.3 v1(89.109,76.9) ; v1(95.3,79.3) U1.J2
  L3(SIG) w0.1: v1(89.109,76.9) 89.573,77.364 90.764,77.364 91.875,78.475 94.475,78.475 v1(95.3,79.3)
DDR2.DQ2: U1.H4 U3.D7 | length 13.9
  L1(SIG) w0.1: U3.D7 v1(85.3,78.1) ; v1(96.9,80.1) U1.H4
  L3(SIG) w0.1: v1(85.3,78.1) 86.875,79.675 89.205,79.675 90.005,80.475 96.525,80.475 v1(96.9,80.1)
DDR2.DQ3: U1.H2 U3.D3 | length 10
  L1(SIG) w0.1: v1(87.316,78.1) U3.D3 ; v1(95.3,80.1) U1.H2
  L3(SIG) w0.1: v1(87.316,78.1) 89.4,78.1 91.4,80.1 v1(95.3,80.1)
DDR2.DQ4: U1.J1 U3.D1 | length 6
  L1(SIG) w0.1: U3.D1@89.491,78.1 89.515,78.1 89.876,77.739 v1(89.891,77.739) ; v1(94.3,78.9) U1.J1
  L3(SIG) w0.1: v1(89.891,77.739) 89.931,77.739 91.091,78.9 v1(94.3,78.9)
DDR2.DQ5: U1.H3 U3.D9 | length 14.7
  L1(SIG) w0.1: U3.D9 v1(83.5,77.7) ; v1(96.1,80.1) U1.H3
  L3(SIG) w0.1: v1(83.5,77.7) 89.283,77.7 91.258,79.675 95.675,79.675 v1(96.1,80.1)
DDR2.DQ6: U1.K2 U3.B1 | length 7.4
  L1(SIG) w0.1: U3.B1@89.508,76.5 89.566,76.5 89.826,76.239 v1(89.892,76.239) ; v1(95.3,78.5) U1.K2
  L3(SIG) w0.1: v1(89.892,76.239) 89.931,76.2 92.7,76.2 94.985,78.485 95.285,78.485 v1(95.3,78.5)
DDR2.DQ7: U1.M1 U3.B9 | length 14.3
  L1(SIG) w0.1: v1(82.7,76.1) U3.B9 ; v1(94.3,76.5) U1.M1
  L3(SIG) w0.1: v1(82.7,76.1) 83.075,76.475 85.725,76.475 87.4,74.8 92.6,74.8 v1(94.3,76.5)
DDR2.DQS0_N: U1.J4 U3.A8 | length 19.3
  L1(SIG) w0.1: U3.A8 v1(84.3,75.3) ; v1(96.9,79.3) U1.J4
  L3(SIG) w0.1: v1(84.3,75.3) 84.578,75.578 84.661,75.578 86.164,74.075 94.704,74.075 94.881,73.898 95.798,73.898 96.702,74.802 96.702,79.066 96.9,79.264 v1(96.9,79.3)
DDR2.DQS0_P: U1.J3 U3.B7 | length 18.8
  L1(SIG) w0.1: U3.B7 v1(85.1,76.1) ; v1(96.1,79.3) U1.J3
  L3(SIG) w0.1: v1(85.1,76.1) 84.822,75.822 84.822,75.739 86.259,74.302 94.798,74.302 94.975,74.125 95.704,74.125 96.475,74.896 96.475,78.925 v1(96.1,79.3)
DDR2.NCAS: U1.P3 U3.G7 | length 19.8
  L1(SIG) w0.1: U3.G7 84.707,80.493 85.007,80.493 86,79.5 86,74.1 87.8,72.3 94.5,72.3 96.05,73.85 96.05,74.45 U1.P3
DDR2.NCS: U1.C4 U3.G8 | length 15.4
  L1(SIG) w0.1: U3.G8 v1(84.3,80.1) ; v1(96.9,84.1) U1.C4
  L6(SIG) w0.1: v1(84.3,80.1) 87.9,83.7 96.5,83.7 v1(96.9,84.1)
DDR2.NRAS: U1.R3 U3.F7 | length 19.6
  L1(SIG) w0.1: U3.F7 85.1,79.7 85.7,79.1 85.7,73.6 87.5,71.8 94.8,71.8 96.5,73.5 U1.R3
DDR2.NWE: U1.N1 U3.F3 | length 12.7
  L1(SIG) w0.1: U3.F3 86.941,78.741 86.941,76.142 88.158,74.925 91.894,74.925 92.419,75.45 94.65,75.45 U1.N1
DDR2.ODT: R16.2 U1.E2 U3.F9 | length 15.4
  L1(SIG) w0.1: v1(82.6,79.5) 82.695,79.5 82.831,79.637 83.037,79.637 U3.F9 ; v1(95.3,82.5) U1.E2
  L6(SIG) w0.1: v1(82.6,79.5) 82.68,79.5 82.905,79.725 84.455,79.725 87.605,82.875 91.887,82.875 92.262,82.5 v1(95.3,82.5)
FLASH_CCLK: U1.F5
FLASH_CLK: R24.2
FLASH_DQ0: U1.H14 U2.5
FLASH_DQ1: U1.H15 U2.2
FLASH_DQ2: R21.1 U1.J12 U2.3
FLASH_DQ3: R20.1 U1.K13 U2.7
FLASH_NCS: U1.L11 U2.1
GND: C1.1 C2.1 C3.1 C4.1 C5.1 C6.1 C7.1 C8.1 C9.1 C10.1 C11.1 C12.1 C13.1 C14.1 C15.1 C16.1 C17.1 C18.1 C19.1 C20.1 C21.1 C22.1 C23.1 C24.1 C25.1 C26.1 C27.1 C28.1 C29.1 C100.1 C101.1 C102.1 C103.1 C104.1 C105.1 C106.1 C107.1 C108.1 C109.1 C110.1 C111.1 C112.1 C113.1 C114.1 C115.1 C116.1 C117.1 C118.1 C119.1 C120.1 C121.1 C122.1 C123.1 C124.1 C125.1 C126.1 C127.2 C128.1 C129.1 C130.1 C131.1 C132.1 C133.1 C134.1 C135.1 C136.1 C137.1 C138.1 C139.1 C140.1 C141.1 C142.1 C143.1 C144.1 C145.1 C146.1 C147.1 C148.1 D2.38 FB100.1 FB100.2 J1.5 J2.7 J2.13 J2.15 J2.21 J2.23 J2.29 J2.35 J2.37 J2.39 J2.41 J2.43 J3.7 J3.13 J3.15 J3.17 J3.23 J3.25 J3.27 J3.33 J3.35 J3.37 J3.39 J3.41 J3.43 J100.2 J100.3 P1.1 P1.3 P1.5 P1.7 P1.9 P1.11 P1.13 Q1.D Q100.D R11.1 R12.1 R14.1 R15.1 R16.1 R26.1 R30.1 R110.1 SW1.1 U1.A1 U1.A15 U1.B8 U1.C2 U1.C12 U1.D5 U1.D6 U1.D14 U1.E4 U1.E7 U1.E9 U1.F6 U1.F8 U1.F10 U1.F13 U1.G3 U1.G6 U1.G7 U1.G8 U1.G9 U1.H6 U1.H8 U1.H9 U1.H10 U1.J6 U1.J7 U1.J8 U1.J9 U1.J13 U1.K6 U1.K8 U1.K10 U1.L2 U1.L6 U1.L7 U1.L8 U1.L9 U1.M11 U1.P4 U1.P8 U1.P13 U1.R1 U1.R15 U2.4 U2.9 U3.A3 U3.A7 U3.B2 U3.B8 U3.D2 U3.D8 U3.E3 U3.E7 U3.J1 U3.K9 U4.1 U4.5 U4.10 U4.11 U4.13 U4.15 U4.25 U4.35 U4.47 U4.51 U5.5 U100.4 U100.5 U100.11 U100.13 U100.17 U100.18 U100.24 U100.25 U100.29 U101.11 X1.2 X2.2 X3.2 | length 35.1
  L1(SIG) w0.254: U1.F6@98.9,81.278 U1.F6 ; U1.G7@99.678,80.5 U1.G7 ; U1.M11 v1(103.3,76.1)
  L1(SIG) w0.3: v1(82.7,83.3) U3.K9 ; U3.B8 U3.A7 ; U3.D8 U3.E7 ; U3.A3 U3.B2 ; U3.E3 U3.D2 ; U3.J1 v1(89.9,82.5) ; v1(94.5,73.7) U1.R1 ; v1(94.5,85.7) U1.A1 ; v1(95.3,84.1) U1.C2 ; v1(95.307,77.693) U1.L2 ; v1(96.1,80.9) U1.G3 ; U1.P4 v1(97.7,74.5) ; U1.E4 U1.D5 v1(98.5,83.3) U1.D6 U1.E7 U1.F8 U1.E9 U1.F10 ; U1.L6 v1(99.3,77.7) ; U1.J6 v1(99.3,78.5) ; U1.H6 v1(99.3,80.1) ; U1.G6 v1(99.289,80.889) ; U1.F6@98.9,81.278 v1(99.289,80.889) ; U1.G7@99.678,80.5 v1(99.289,80.889) ; U1.L7 v1(99.3,77.7) ; U1.J7 U1.K6 v1(99.3,77.7) ; v1(100.1,74.5) U1.P8 ; v1(100.1,84.9) U1.B8 ; U1.L8 v1(100.9,77.7) ; U1.J8 v1(100.9,78.5) ; U1.H8 v1(100.9,80.1) ; U1.G8 v1(100.9,80.1) ; U1.L9 U1.K8 v1(100.9,78.5) ; U1.G9 v1(100.9,80.1) ; U1.K10 v1(102.5,77.7) ; U1.H10 v1(101.7,79.3) ; U1.C12 v1(104.1,84.1) ; U1.P13 v1(104.9,74.5) ; U1.J13 v1(104.9,78.5) ; U1.F13 v1(104.9,81.7) ; U1.D14 v1(105.7,83.3) ; U1.R15 v1(106.5,73.7) ; U1.A15 v1(106.5,85.7) ; v1(100.9,78.5) U1.J9 v1(101.7,79.3) ; v1(100.9,80.1) U1.H9 v1(101.7,79.3)
  other v1: 84.3,76.1 88.3,76.1 84.3,78.5 88.3,78.5 100.1,81.7 101.7,81.7
JTAG_TCK: R2.2 U1.E5
JTAG_TDI: R3.1 R8.2 U1.L4
JTAG_TDO: R9.2 U1.K4
JTAG_TMS: R4.1 R10.2 U1.K5
LED_FGPA: Q1.G U1.R5
NetC16_2: C16.2 C17.2 FB1.2 U4.9
NetC18_2: C18.2 C19.2 FB2.2 U4.4
NetC25_2: C25.2 D4.A FB3.2 R25.2
NetC110_2: C110.2 U101.6
NetD1_A: D1.A R1.1
NetD2_29: D2.29 P1.6 R8.1
NetD2_47: D2.47 P1.8 R9.1
NetD2_56: D2.56 P1.10 R10.1
NetD2_110: D2.110 P1.4 R2.1
NetD3_A: D3.A R23.1
NetD3_K: D3.K Q1.S
NetD100_A: D100.A R106.1
NetD100_K: D100.K Q100.S
NetL100_1: L100.1 U100.3
NetL101_1: L101.1 U100.6
NetL102_1: L102.1 U100.19
NetQ100_G: Q100.G R100.1 U100.23
NetR1_2: R1.2 R7.1 U1.G5
NetR5_1: R5.1 U1.M5
NetR6_1: R6.1 U1.L5
NetR11_2: R11.2 U1.N5
NetR12_2: R12.2 U1.M6
NetR25_1: R25.1 R26.2 U4.14
NetR27_1: R27.1 R31.2 U5.4
NetR28_1: R28.1 U4.62 U5.2
NetR29_1: R29.1 U4.63 U5.1
NetR30_2: R30.2 U4.6
NetR31_1: R31.1 U4.61 U5.3
NetR101_1: R101.1 R107.2 U100.12
NetR102_1: R102.1 U100.10
NetR103_1: R103.1 R105.2 U100.27
NetR104_1: R104.1 U100.1
NetR105_1: R105.1 U100.9
NetR107_1: R107.1 U100.21
NetR109_2: R109.2 U101.4
NetR110_2: R110.2 U101.5
NetSW1_2: SW1.2 U1.J5
NetU4_2: U4.2 X3.3
NPUDC: R19.1 U1.K11
PWR_EN: C109.2 R108.1 U101.7
QSPI_CLK: R24.1 U2.6
TCK: U4.16
TDI: U4.17
TDO: U4.18
TMS: U4.19
UART_RX: U1.B15 U4.38
UART_TX: U1.C15 U4.39
USB_D_N: J1.2 U4.7
USB_D_P: J1.3 U4.8
pads on no net: J1.4 J1.SH J2. J2.2 J2.4 J2.6 J2.8 J2.10 J2.12 J2.14 J2.16 J2.18 J2.20 J2.22 J2.24 J2.26 J2.28 J2.30 J2.32 J2.34 J2.36 J2.38 J2.40 J2.42 J3. J3.2 J3.4 J3.6 J3.8 J3.10 J3.12 J3.14 J3.16 J3.18 J3.20 J3.22 J3.24 J3.26 J3.28 J3.30 J3.32 J3.34 J3.36 J3.38 J3.40 J3.42 P1.12 P1.14 U1.A6 U1.A7 U1.A8 U1.A9 U1.A10 U1.A11 U1.A12 U1.A13 U1.A14 U1.B6 U1.B9 U1.B10 U1.B11 U1.B12 U1.B13 U1.B14 U1.C6 U1.C7 U1.C8 U1.C9 U1.C10 U1.C13 U1.C14 U1.D1 U1.D3 U1.D7 U1.D8 U1.D9 U1.D10 U1.D11 U1.D15 U1.E1 U1.E3 U1.E11 U1.E14 U1.E15 U1.F1 U1.F2 U1.F3 U1.F4 U1.F11 U1.F14 U1.F15 U1.G1 U1.G4 U1.G11 U1.G12 U1.G15 U1.H11 U1.H12 U1.H13 U1.J11 U1.J15 U1.K12 U1.K14 U1.K15 U1.L1 U1.L10 U1.L12 U1.L15 U1.M3 U1.M7 U1.M8 U1.M13 U1.M14 U1.M15 U1.N4 U1.N8 U1.N9 U1.N10 U1.N11 U1.N12 U1.N13 U1.N14 U1.N15 U1.P6 U1.P7 U1.P10 U1.P11 U1.P12 U1.P14 U1.P15 U1.R6 U1.R7 U1.R8 U1.R11 U1.R12 U1.R14 U3.A2 U3.L3 U3.L7 U4.3 U4.21 U4.22 U4.23 U4.24 U4.26 U4.27 U4.28 U4.29 U4.30 U4.32 U4.33 U4.34 U4.36 U4.40 U4.41 U4.43 U4.44 U4.45 U4.46 U4.48 U4.52 U4.53 U4.54 U4.55 U4.57 U4.58 U4.59 U4.60 U5.6 U5.7 U100.14 U100.16

## Text inside footprints (layer, text, board x,y; h text height)
D1: Mechanical 13 "+" at 269.262,108.077 h0.5
D3: Mechanical 13 "+" at 203.476,37.846 h0.5
D4: Mechanical 13 "K" at 336.562,143.871 h1; Mechanical 13 "A" at 332.062,143.871 h1
D100: Mechanical 13 "+" at 486.156,124.228 h0.5 r90
D101: Mechanical 13 "K" at 603.643,125.837 h1; Mechanical 13 "A" at 599.143,125.837 h1
U3: Mechanical 13 "A" at 91.621,76.335 h1.27 r180; Mechanical 13 "L" at 91.621,84.335 h1.27 r180; Mechanical 13 "1" at 88.865,74.01 h1.27 r270; Mechanical 13 "9" at 82.465,74.01 h1.27 r270; Top Overlay "A" at 91.621,76.335 h1.27 r180; Top Overlay "L" at 91.621,84.335 h1.27 r180; Top Overlay "1" at 88.865,74.01 h1.27 r270; Top Overlay "9" at 82.465,74.01 h1.27 r270; Bottom Overlay "A" at 90.986,76.335 h1.27 r180; Bottom Overlay "L" at 90.986,84.335 h1.27 r180; Bottom Overlay "1" at 90.135,74.01 h1.27 r90; Bottom Overlay "9" at 83.735,74.01 h1.27 r90